# Altium PCB PiMX8MP_r0.3.PcbDoc (part 10 of 10)
Units mm, origin at the board's own origin, x right, y up, seen from the top; angles counter-clockwise.
Board outline 55 x 40 mm, 10 copper layers (Top Layer, Layer 1, Layer 2, Layer 3, Layer 4, Layer 5, Layer 6, Layer 7, Layer 8, Bottom Layer), stack 1.472 mm thick; 545 components, 477 nets, 2606 pads, 2278 vias.
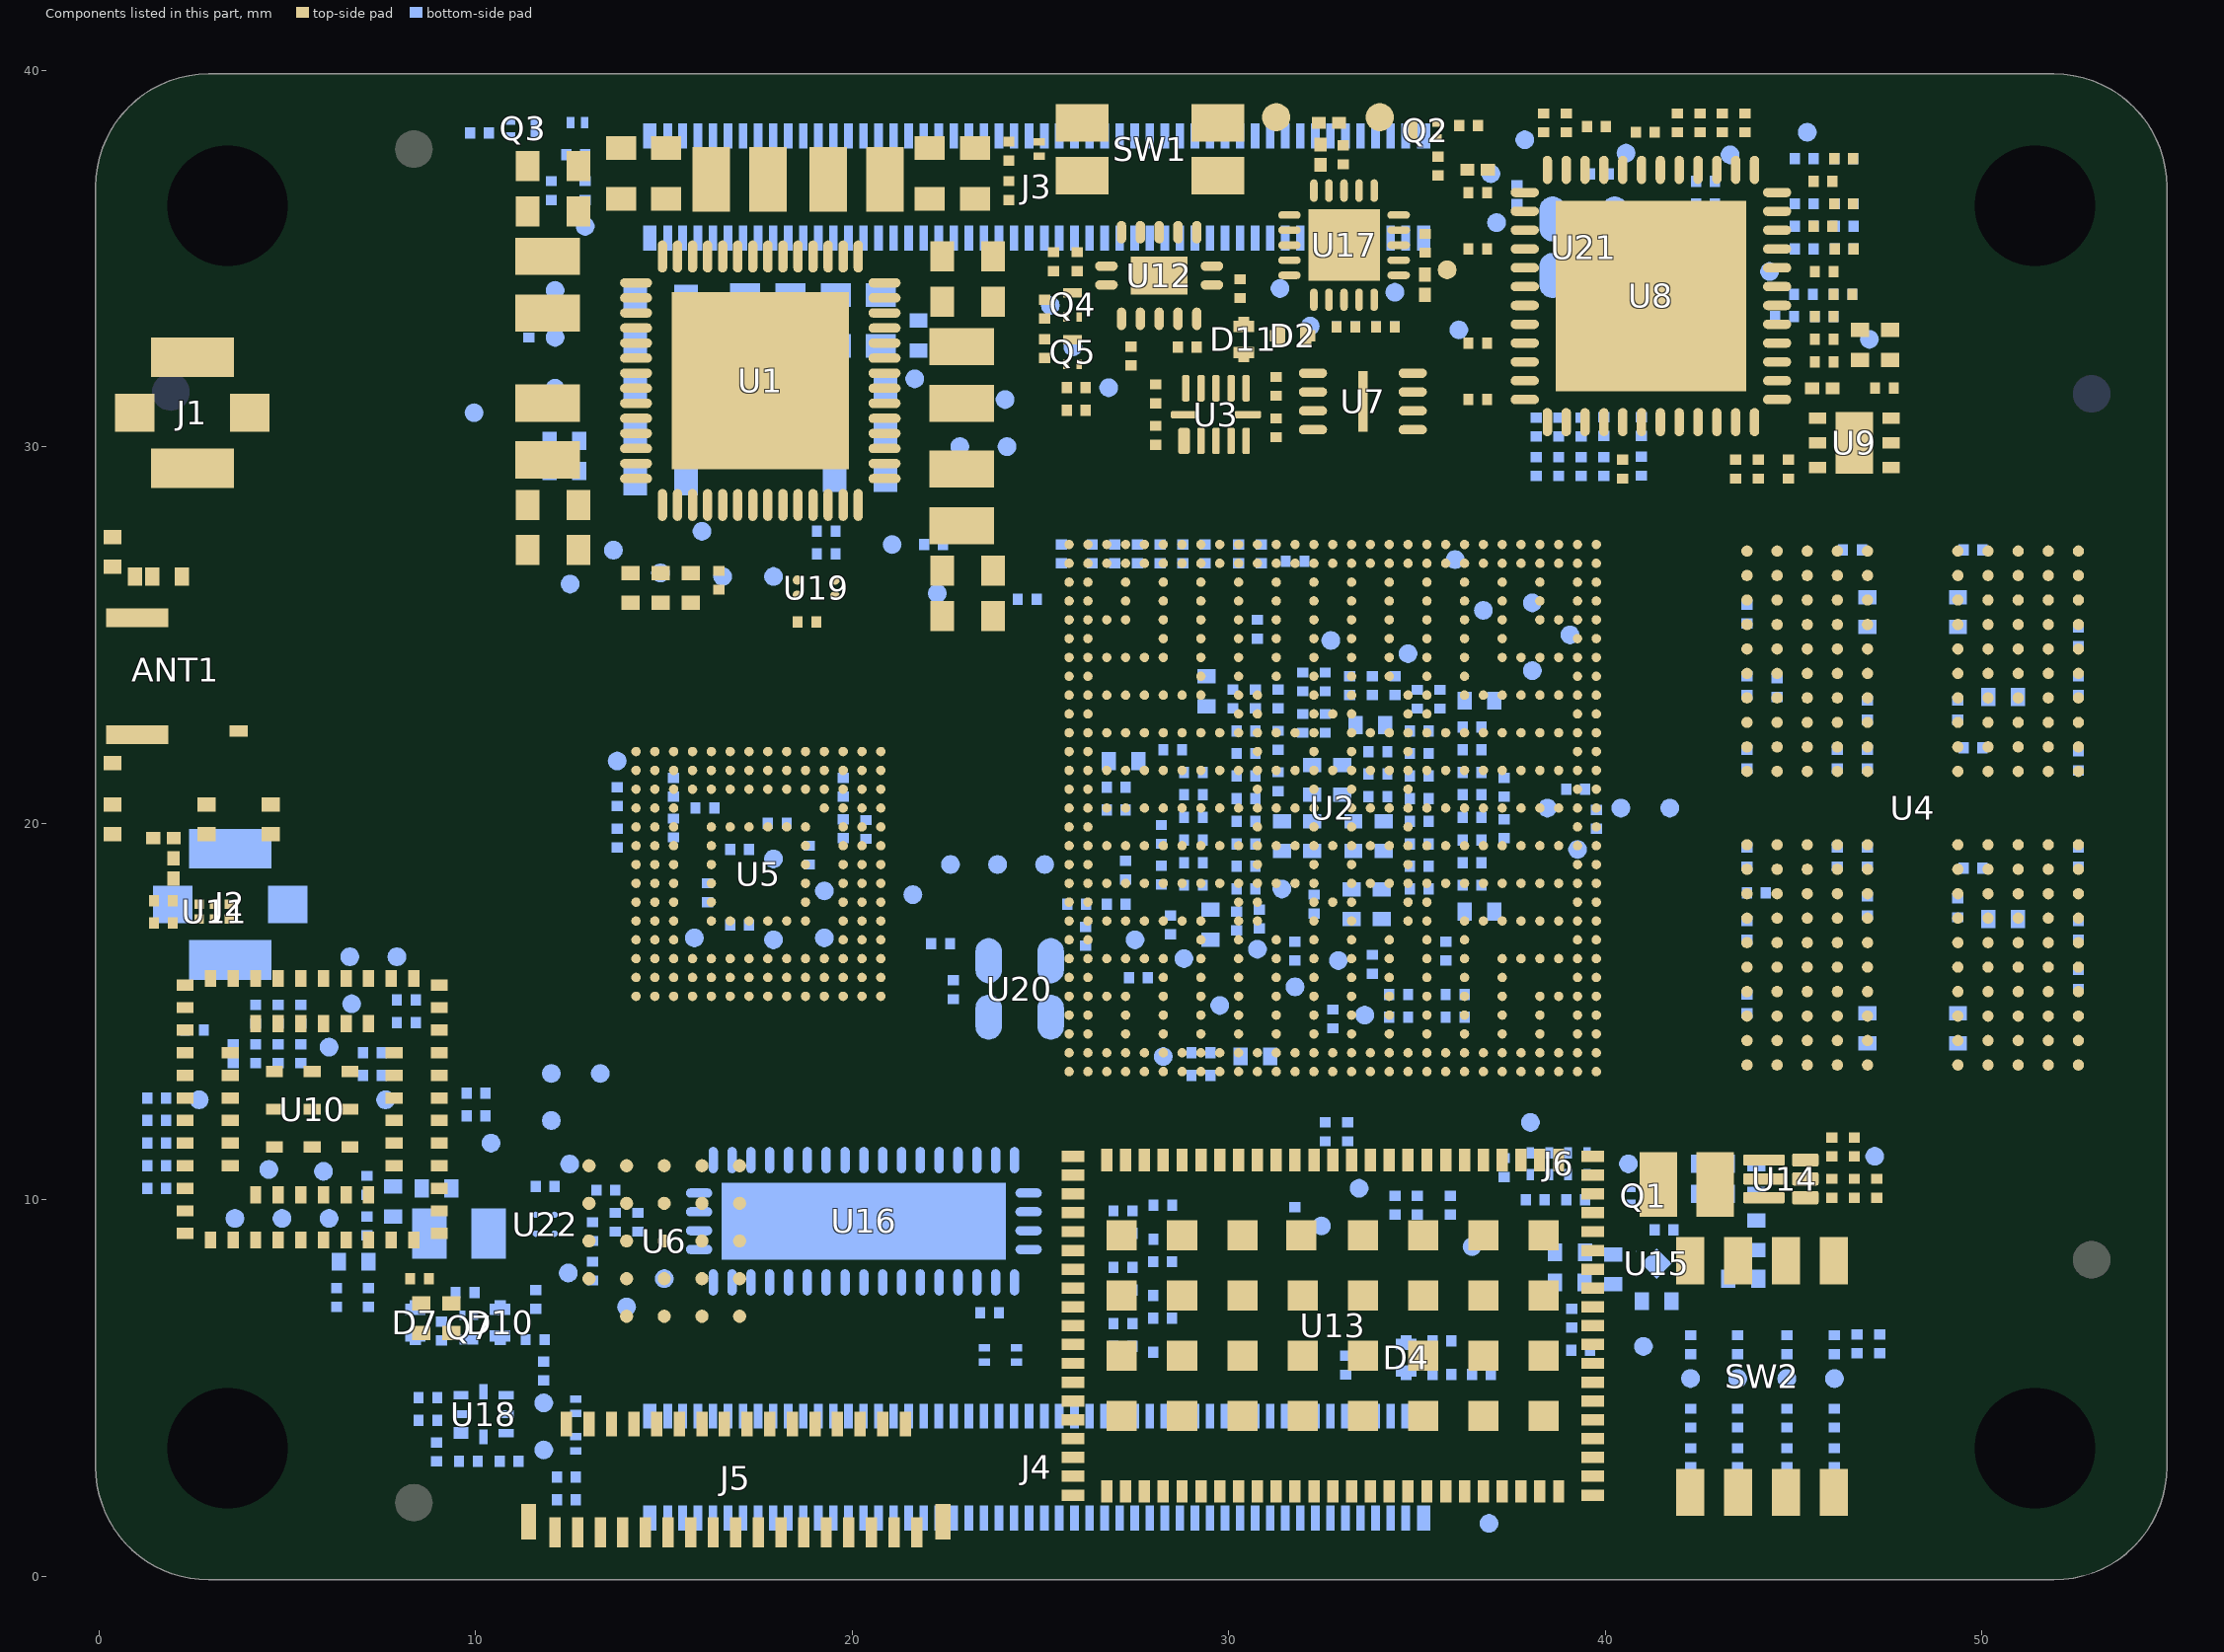
[diagram p18: the components of this part, seen from the top]

## Polygon pours and split planes (outlines as drawn) (continued)
GND on Layer 3 "GND_L04_P074" (solid, remove dead copper, pour order 74): 3.412,6.604 1.362,6.604 cw(c1.362,7.804) 0.162,7.804 0.162,19.704 cw(c0.362,19.704) 0.362,19.904 5.912,19.904 5.912,27.404 0.362,27.404 cw(c0.362,27.604) 0.162,27.604 0.162,32.004 cw(c1.362,32.004) 1.362,33.204 3.412,33.204 ccw(c3.412,36.404) 6.612,36.404 6.612,38.454 cw(c7.812,38.454) 7.812,39.654 47.012,39.654 cw(c47.012,38.454) 48.212,38.454 48.212,36.404 ccw(c51.412,36.404) 51.412,33.204 53.462,33.204 cw(c53.462,32.004) 54.662,32.004 54.662,7.804 cw(c53.462,7.804) 53.462,6.604 51.412,6.604 ccw(c51.412,3.404) 48.212,3.404 48.212,1.354 cw(c47.012,1.354) 47.012,0.154 7.812,0.154 cw(c7.812,1.354) 6.612,1.354 6.612,3.404 ccw(c3.412,3.404)
GND on Layer 6 "GND_L07_P076" (solid, remove dead copper, pour order 76): 3.412,6.604 1.362,6.604 cw(c1.362,7.804) 0.162,7.804 0.162,19.704 cw(c0.362,19.704) 0.362,19.904 5.912,19.904 5.912,27.404 0.362,27.404 cw(c0.362,27.604) 0.162,27.604 0.162,32.004 cw(c1.362,32.004) 1.362,33.204 3.412,33.204 ccw(c3.412,36.404) 6.612,36.404 6.612,38.454 cw(c7.812,38.454) 7.812,39.654 47.012,39.654 cw(c47.012,38.454) 48.212,38.454 48.212,36.404 ccw(c51.412,36.404) 51.412,33.204 53.462,33.204 cw(c53.462,32.004) 54.662,32.004 54.662,7.804 cw(c53.462,7.804) 53.462,6.604 51.412,6.604 ccw(c51.412,3.404) 48.212,3.404 48.212,1.354 cw(c47.012,1.354) 47.012,0.154 7.812,0.154 cw(c7.812,1.354) 6.612,1.354 6.612,3.404 ccw(c3.412,3.404)
GND on Layer 1 "GND_L02_P073" (solid, remove dead copper, pour order 73): 3.412,6.604 1.362,6.604 cw(c1.362,7.804) 0.162,7.804 0.162,19.704 cw(c0.362,19.704) 0.362,19.904 5.912,19.904 5.912,27.404 0.362,27.404 cw(c0.362,27.604) 0.162,27.604 0.162,32.004 cw(c1.362,32.004) 1.362,33.204 3.412,33.204 ccw(c3.412,36.404) 6.612,36.404 6.612,38.454 cw(c7.812,38.454) 7.812,39.654 47.012,39.654 cw(c47.012,38.454) 48.212,38.454 48.212,36.404 ccw(c51.412,36.404) 51.412,33.204 53.462,33.204 cw(c53.462,32.004) 54.662,32.004 54.662,7.804 cw(c53.462,7.804) 53.462,6.604 51.412,6.604 ccw(c51.412,3.404) 48.212,3.404 48.212,1.354 cw(c47.012,1.354) 47.012,0.154 7.812,0.154 cw(c7.812,1.354) 6.612,1.354 6.612,3.404 ccw(c3.412,3.404)

## Keep-outs
Top Layer:
  circle w0.2: c3.412,3.404 r2.9
  circle w0.2: c3.412,36.404 r2.9
  circle w0.2: c51.412,36.404 r2.9
  circle w0.2: c51.412,3.404 r2.9
Bottom Layer:
  circle w0.2: c51.412,3.404 r2.9
  circle w0.2: c51.412,36.404 r2.9
  circle w0.2: c3.412,3.404 r2.9
  circle w0.2: c3.412,36.404 r2.9

## Other copper
Top Layer:
  pour cut-out: 8.362,36.654 cw(c8.362,37.904) 7.112,37.904 cw(c8.362,37.904) 8.362,39.154 cw(c8.362,37.904) 9.612,37.904 cw(c8.362,37.904)
  pour cut-out: 9.612,1.954 cw(c8.362,1.954) 8.362,0.704 cw(c8.362,1.954) 7.112,1.954 cw(c8.362,1.954) 8.362,3.204 cw(c8.362,1.954)
  pour cut-out: 54.162,8.404 cw(c52.912,8.404) 52.912,7.154 cw(c52.912,8.404) 51.662,8.404 cw(c52.912,8.404) 52.912,9.654 cw(c52.912,8.404)
  region net CHIP_ANT: 1.712,20.154 1.712,19.904 cw(c1.487,19.58) 1.862,19.704 2.062,19.704 cw(c2.437,19.579) 2.212,19.904 2.212,20.154
  region net VCC3.3_SYS: 8.862,6.904 7.012,6.904 6.912,6.804 6.912,6.254 7.012,6.154 8.812,6.154 8.912,6.254 8.912,6.854
  region net VCC3.3_SYS: 21.562,31.404 21.962,31.804 24.062,31.804 24.162,31.904 24.162,33.154 24.062,33.254 23.212,33.254 23.012,33.454 23.012,35.404 22.912,35.504 22.062,35.504 21.962,35.404 21.962,32.354 21.712,32.104 20.462,32.104 20.412,32.054 20.412,31.454 20.462,31.404
  region net VCC3.3_SYS: 48.562,29.154 48.662,29.254 48.662,32.504 48.562,32.604 47.262,32.604 47.212,32.554 47.212,32.054 47.462,31.804 47.462,31.154 47.312,31.004 47.312,30.554 47.362,30.504 47.912,30.504 47.962,30.454 47.962,29.754 47.912,29.704 47.362,29.704 47.312,29.654 47.312,29.204 47.362,29.154
  region net GND: 45.712,28.954 45.912,29.154 47.162,29.154 47.212,29.204 47.212,31.054 47.362,31.204 47.362,31.704 47.312,31.754 47.012,31.754 46.962,31.704 46.962,31.554 46.412,31.004 46.112,31.004 46.062,30.954 46.062,29.804 45.962,29.704 45.362,29.704 45.312,29.654 45.312,29.404 45.262,29.354 44.612,29.354 44.562,29.304 44.562,29.004 44.612,28.954 44.662,28.954
  region net GND: 44.762,10.854 44.812,10.904 44.812,11.304 44.762,11.354 43.612,11.354 43.562,11.304 43.562,10.904 43.612,10.854
  region net GND: 23.612,37.304 23.762,37.454 23.762,38.405 23.612,38.554 21.712,38.554 21.612,38.454 21.612,37.404 21.712,37.304
  region net GND: 25.412,36.254 25.512,36.154 26.712,36.154 26.812,36.254 26.812,36.704 26.962,36.854 28.862,36.854 29.162,36.554 29.512,36.554 29.612,36.454 29.612,36.254 29.712,36.154 30.312,36.154 30.412,36.254 30.412,37.704 30.312,37.804 25.762,37.804 25.412,37.454 25.412,36.704
  region net GND: 23.112,35.404 23.212,35.504 24.062,35.504 24.162,35.404 24.162,33.454 24.062,33.354 23.262,33.354 23.112,33.504
  region net GND: 15.412,37.304 15.562,37.454 15.562,38.405 15.412,38.554 13.512,38.554 13.412,38.454 13.412,37.404 13.512,37.304
  region net GND: 11.862,35.754 12.012,35.904 12.012,37.804 11.912,37.904 11.062,37.904 10.962,37.804 10.962,35.804 11.012,35.754
  region net GND: 23.112,27.054 23.262,27.204 24.062,27.204 24.112,27.154 24.112,24.954 24.062,24.904 23.212,24.904 23.112,25.004
  region net GND: 13.85,24.9 13.75,25 13.75,26.05 13.85,26.15 16.15,26.15 16.262,26.354 16.712,26.354 16.762,26.404 16.762,27.004 16.412,27.354 16.412,28.854 16.462,28.904 16.662,28.904 16.712,28.854 16.712,27.904 16.662,27.854 16.662,27.554 16.812,27.404 17.862,27.404 18.25,27.017 18.25,24.9
  region net GND: 18.812,25.2 18.812,26.362 19.15,26.7 20.7,26.7 20.85,26.55 20.85,25.2 20.8,25.15 18.862,25.15
  region net GND: 10.962,28.904 11.012,28.954 11.862,28.954 12.012,28.804 12.012,26.854 12.162,26.704 13.562,26.704 13.662,26.604 13.662,25.004 13.562,24.904 11.362,24.904 10.962,25.304
  region net VCC1.8_SNVS: 15.862,28.904 15.912,28.854 15.912,27.204 16.062,27.054 16.062,26.454 16.012,26.404 15.412,26.404 15.362,26.454 15.362,27.004 15.612,27.254 15.612,28.854 15.662,28.904
  pour cut-out: 26.662,4.354 26.662,5.454 25.512,5.454 25.512,5.854 26.662,5.854 26.662,6.954 25.512,6.954 25.512,7.354 26.662,7.354 26.662,8.454 25.412,8.454 25.162,8.204 25.162,4.654 25.462,4.354
  region net ENET_VDDAL: 45.162,29.454 45.212,29.504 45.212,29.754 45.312,29.854 45.312,30.354 45.362,30.404 45.912,30.404 45.962,30.454 45.962,31.004 46.062,31.104 46.212,31.104 46.262,31.154 46.262,31.754 46.212,31.804 45.862,31.804 45.812,31.754 45.812,31.304 45.712,31.204 45.262,31.204 44.562,30.504 44.562,29.504 44.612,29.454
  region net PMIC_VINT: 16.262,28.904 16.312,28.854 16.312,27.304 16.662,26.954 16.662,26.504 16.612,26.454 16.212,26.454 16.162,26.504 16.162,27.104 16.012,27.254 16.012,28.854 16.062,28.904
  region net 8M_ONOFF: 25.812,37.954 30.312,37.954 30.412,38.054 30.412,39.104 25.412,39.104 25.412,38.354
  region net VCC1.8_SYS: 9.012,6.254 9.112,6.154 10.062,6.154 10.162,6.254 10.162,6.854 10.112,6.904 9.062,6.904 9.012,6.854
  region net WIFI_VCCIO: 8,7.717 8,8 7.896,8.104 7.512,8.104 7.412,8.204 7.412,9.154 7.362,9.204 6.962,9.204 6.912,9.154 6.912,8.104 6.912,7.104 7.012,7.004 10.112,7.004 10.162,7.054 10.162,7.454 10.062,7.554 8.162,7.554
  pour cut-out: 34.962,2.704 34.962,1.504 35.368,1.099 37.156,1.099 37.218,1.16 37.218,1.649 37.156,1.71 35.656,1.71 35.562,1.804 35.562,2.704
  region net TPU_VIN: 41.462,7.504 41.512,7.554 41.512,9.204 41.712,9.404 42.162,9.404 42.262,9.504 42.262,11.404 42.162,11.504 37.212,11.504 37.112,11.404 37.112,10.754 37.212,10.654 38.162,10.654 39.212,9.604 39.212,7.554 39.262,7.504
  region net TPU_3V3_BCK_IN: 44.762,10.254 43.612,10.254 43.562,10.204 43.562,9.554 43.612,9.504 44.762,9.504 44.812,9.554 44.812,10.204
  region net TPU_PSU_SW: 44.762,10.754 43.562,10.754 43.462,10.854 43.462,11.304 43.412,11.354 42.462,11.354 42.412,11.304 42.412,9.554 42.462,9.504 43.412,9.504 43.462,9.554 43.462,10.254 43.562,10.354 44.762,10.354 44.812,10.404 44.812,10.704
  region net DRAM_VCC1.1: 12.862,30.454 12.862,29.104 12.962,29.004 13.112,29.004 13.212,28.904 13.212,26.904 13.112,26.804 12.212,26.804 12.112,26.904 12.112,28.854 11.912,29.054 11.012,29.054 10.962,29.104 10.962,30.404 11.012,30.454
  region net PMIX_LX6: 11.012,31.704 14.662,31.704 14.712,31.654 14.712,31.054 14.662,31.004 13.262,31.004 12.862,30.604 11.012,30.604 10.962,30.654 10.962,31.654
  region net VCC5.0_SYS: 14.662,31.804 13.312,31.804 13.212,31.904 13.212,32.804 13.312,32.904 14.662,32.904 14.712,32.854 14.712,31.854
  region net VCC_SD2: 13.712,29.304 13.812,29.404 14.662,29.404 14.712,29.454 14.712,29.654 14.662,29.704 13.662,29.704 13.312,29.354 13.312,28.004 13.362,27.954 13.662,27.954 13.712,28.004
  region net VCC_ARM: 12.862,34.304 12.862,35.604 12.962,35.704 13.112,35.704 13.212,35.804 13.212,37.804 13.112,37.904 12.212,37.904 12.112,37.804 12.112,35.854 11.912,35.654 11.012,35.654 10.962,35.604 10.962,34.304 11.012,34.254 12.812,34.254
  region net PMIX_LX2: 11.012,33.004 14.662,33.004 14.712,33.054 14.712,33.654 14.662,33.704 13.262,33.704 12.862,34.104 11.012,34.104 10.962,34.054 10.962,33.054
  region net NetC31_1: 15.062,28.904 15.112,28.854 15.112,27.554 14.462,26.904 14.462,26.454 14.412,26.404 13.812,26.404 13.762,26.454 13.762,26.904 14.812,27.954 14.812,28.854 14.862,28.904
  region net NetC23_1: 15.462,28.904 15.512,28.854 15.512,27.304 15.262,27.054 15.262,26.454 15.212,26.404 14.612,26.404 14.562,26.454 14.562,26.854 15.212,27.504 15.212,28.854 15.262,28.904
  region net VCC5.0_SYS: 13.812,29.254 13.862,29.304 14.662,29.304 14.712,29.254 14.712,29.054 14.662,29.004 14.462,29.004 14.312,28.854 14.312,28.004 14.262,27.954 13.862,27.954 13.812,28.004
  region net VCC_SOC: 16.912,36.204 16.812,36.104 13.512,36.104 13.412,36.204 13.412,37.104 13.512,37.204 15.462,37.204 15.662,37.404 15.662,38.404 15.812,38.554 16.762,38.554 16.912,38.404
  region net VCC5.0_SYS: 17.612,34.654 17.612,35.754 17.962,36.104 18.612,36.104 18.712,36.004 18.712,34.654 18.662,34.604 17.662,34.604
  region net PMIX_LX1: 17.512,35.804 17.912,36.204 18.262,36.204 18.312,36.254 18.312,38.004 18.262,38.054 17.262,38.054 17.212,38.004 17.212,36.304 16.812,35.904 16.812,34.654 16.862,34.604 17.462,34.604 17.512,34.654
  region net VCC1.8_SYS: 22.012,28.554 21.912,28.454 21.912,25.004 22.012,24.904 22.912,24.904 23.012,25.004 23.012,27.104 23.212,27.304 24.062,27.304 24.162,27.404 24.162,28.454 24.062,28.554
  region net PMIX_LX5: 23.812,28.854 21.412,28.854 21.262,29.004 20.462,29.004 20.412,29.054 20.412,29.254 20.462,29.304 21.612,29.304 22.012,29.704 22.012,29.904 22.062,29.954 22.262,29.954 23.812,29.954 23.862,29.904 23.862,28.904
  region net VCC5.0_SYS: 20.462,30.504 21.812,30.504 21.912,30.404 21.912,29.754 21.562,29.404 20.462,29.404 20.412,29.454 20.412,30.454
  region net PMIX_LX3: 18.812,38.004 18.812,34.654 18.862,34.604 19.462,34.604 19.512,34.654 19.512,35.804 19.912,36.204 19.912,38.004 19.862,38.054 18.862,38.054
  region net PMIX_LX4: 23.712,30.604 20.462,30.604 20.412,30.654 20.412,31.254 20.462,31.304 21.612,31.304 22.012,31.704 23.762,31.704 23.762,30.654
  region net SD_PWR_ON: 21.662,32.204 21.862,32.404 21.862,32.754 21.812,32.804 21.512,32.804 21.462,32.754 21.462,32.654 21.312,32.504 20.462,32.504 20.412,32.454 20.412,32.254 20.462,32.204
  region net VCC_SOC: 20.217,36.204 20.317,36.104 23.617,36.104 23.717,36.204 23.717,37.104 23.617,37.204 21.667,37.204 21.462,37.409 21.462,38.459 21.367,38.554 20.312,38.554 20.217,38.459
  region net VCC5.0_SYS: 17.512,38.304 17.512,38.504 17.962,38.954 19.062,38.954 19.512,38.504 19.512,38.304 19.412,38.204 17.612,38.204
  region net VCC1.8_SYS: 46.412,32.604 47.012,32.604 47.062,32.554 47.062,32.054 46.862,31.854 46.862,31.654 46.762,31.554 46.462,31.554 46.362,31.654 46.362,32.554
  region net ETH_VDDIO: 46.362,32.854 46.362,33.554 46.462,33.654 47.062,33.654 47.162,33.754 47.162,34.254 47.212,34.304 47.662,34.304 47.862,34.104 47.862,32.854 47.812,32.804 46.412,32.804
  pour cut-out: 2.512,15.354 2.512,16.104 1.527,16.104 0.962,16.104 0.962,17.204 1.527,17.204 1.527,19.904 2.412,19.904 2.412,18.279 3.887,18.279 3.887,16.879 3.412,16.404 3.412,15.354
  text ".Layer_Name" at -4.872,-98.983 h2.5
Layer 1:
  region net VCC5.0_SYS: 17.912,35.004 18.412,35.004 cw(c18.412,34.804) 18.612,34.804 cw(c18.412,34.804) 18.412,34.604 17.912,34.604 cw(c17.912,34.804) 17.712,34.804 cw(c17.912,34.804)
  region net VCC1.8_SYS: 9.612,6.604 9.862,6.854 10.062,6.854 10.412,6.504 10.412,6.154 10.162,5.904 9.962,5.904 9.612,6.254
  region net VCC5.0_SYS: 13.312,32.404 13.712,32.804 14.462,32.804 14.562,32.704 14.562,32.304 14.162,31.904 13.412,31.904 13.312,32.004
  region net VCC5.0_SYS: 20.562,30.004 20.962,30.404 21.712,30.404 21.812,30.304 21.812,29.904 21.412,29.504 20.662,29.504 20.562,29.604
  text ".Layer_Name" at -2.806,-98.983 h2.5
Layer 2:
  pour cut-out: 7.317,19.364 5.967,18.014 2.867,18.014 2.467,18.414 1.667,18.414 1.317,18.064 1.317,16.664 3.317,14.664 3.867,14.664 4.267,15.064 6.567,15.064 6.967,14.664 6.967,11.064 6.717,10.814 4.617,10.814 2.417,13.014 1.367,13.014 0.917,12.564 0.917,8.864 2.917,6.864 4.517,6.864 4.817,6.564 8.267,6.564 8.717,6.114 8.717,4.964 8.267,4.514 8.267,3.514 8.667,3.114 9.217,3.114 9.967,3.864 9.967,4.864 10.217,5.114 11.567,5.114 11.917,4.764 11.917,2.564 13.567,0.914 31.867,0.914 33.317,2.364 34.067,2.364 34.967,3.264 37.617,3.264 40.317,0.564 47.367,0.564 47.867,1.064 47.867,2.864 47.117,3.614 47.117,5.664 46.667,6.114 44.967,6.114 44.517,6.564 42.867,6.564 42.667,6.764 42.667,7.014 41.667,8.014 41.667,8.564 41.967,8.864 42.617,8.864 43.667,9.914 45.867,9.914 46.417,10.464 46.417,10.964 46.717,11.264 48.367,11.264 49.117,12.014 52.017,12.014 53.367,13.364 53.367,20.064 38.27,20.064 35.758,17.552 32.33,17.552 31.849,17.071 29.779,17.071 29.417,17.433 29.417,19.461 29.091,19.788 29.091,22.212 28.976,22.327 28.251,22.327 28.067,22.511 28.067,23.414 7.317,23.414
  pour cut-out: 7.212,23.664 7.212,28.854 6.612,29.454 6.612,32.454 9.312,35.154 9.312,39.204 9.462,39.354 25.212,39.354 25.762,38.804 26.462,38.804 26.862,39.204 29.983,39.204 30.097,39.319 47.397,39.319 47.962,38.754 47.962,35.054 48.812,34.204 48.812,31.204 47.612,30.004 47.162,30.004 47.062,29.904 47.062,29.404 47.162,29.304 48.112,29.304 48.812,28.604 51.562,28.604 53.262,26.904 53.262,20.314 38.109,20.314 37.42,21.003 37.42,23.464 36.972,23.913 28.27,23.913 28.022,23.664
  region net VCC1.8_SYS: 9.912,6.304 10.162,6.554 11.262,6.554 11.362,6.454 11.362,6.254 10.862,5.754 10.112,5.754 9.912,5.954
  text ".Layer_Name" at -2.581,-98.983 h2.5
Layer 3:
  text ".Layer_Name" at -2.581,-98.983 h2.5
Layer 4:
  region net GND: 6.162,18.654 7.112,19.604 7.112,28.904 6.212,29.804 0.362,29.804 0.362,27.604 6.112,27.604 6.112,19.704 0.362,19.704 0.362,18.654
  text ".Layer_Name" at -2.581,-98.983 h2.5
Layer 5:
  region net GND: 0.362,18.504 6.312,18.504 7.212,19.404 7.212,28.604 7.012,28.804 7.012,29.104 7.012,36.654 6.812,36.654 6.812,36.454 cw(c3.359,36.454) 3.359,33.001 1.359,33.001 ccw(c1.359,32.004) 0.362,32.004 0.362,27.604 6.112,27.604 6.112,19.704 0.362,19.704
  text ".Layer_Name" at -2.581,-98.983 h2.5
Layer 6:
  text ".Layer_Name" at -2.581,-98.983 h2.5
Layer 7:
  region net VCC3.3_SYS: 20.862,36.304 21.012,36.454 21.762,36.454 21.812,36.404 21.812,35.804 21.362,35.354 20.962,35.354 20.862,35.454
  region net VCC1.8_SYS: 17.112,36.954 17.662,36.404 17.662,35.454 17.362,35.154 17.012,35.154 16.762,35.404 16.762,36.854 16.862,36.954
  region net GPIO_VREF: 19.712,35.754 19.262,36.204 19.262,36.404 19.362,36.504 19.612,36.504 20.112,36.004 20.112,35.454 20.012,35.354 19.812,35.354 19.712,35.454
  pour cut-out: 7.987,6.529 8.187,6.329 8.187,5.537 7.8,5.15 7.8,3.15 9.471,1.479 11.487,1.479 13.237,1.479 13.987,0.729 16.237,0.729 16.408,0.9 22.217,0.9 22.337,0.779 22.637,0.479 31.337,0.479 31.487,0.329 33.779,0.329 34.55,1.1 34.55,2.2 35.1,2.75 35.1,4 35.329,4.229 35.837,4.229 36.037,4.029 36.037,3.729 36.287,3.479 39.087,3.479 39.487,3.879 39.687,3.879 39.987,3.579 40.387,3.579 40.537,3.429 40.537,2.829 40.987,2.379 41.637,2.379 41.987,2.729 44.987,2.729 45.137,2.579 45.137,1.879 46.037,0.979 47.137,0.979 47.437,1.279 47.437,4.929 45.637,6.729 45.637,9.055 45.383,9.31 45.383,9.775 45.787,10.179 45.787,10.929 44.687,12.029 44.687,13.929 45.737,14.979 45.737,19.779 45.487,20.029 43.937,20.029 43.587,20.379 43.587,22.929 42.937,23.579 42.937,26.779 43.687,27.529 43.687,27.629 41.337,27.629 36.637,32.329 36.637,34.579 36.293,34.924 36.293,35.235 36.847,35.789 36.847,39.154 15.712,39.154 14.937,38.379 14.087,38.379 13.362,39.104 9.112,39.104 8.587,38.579 8.587,36.829 7.937,36.179 7.937,32.229 7.687,31.979 7.112,31.404 7.112,23.654 7.737,23.029 8.787,21.979 8.787,16.279 6.587,14.079 6.587,10.779 7.687,9.679 7.687,7.829 7.337,7.479 5.837,7.479 5.587,7.229 5.587,6.779 5.837,6.529
  region net VCC5.0_SYS: 44.762,8.254 45.162,8.654 45.462,8.654 45.612,8.504 45.612,7.104 45.462,6.954 44.962,6.954 44.762,7.154
  text ".Layer_Name" at -2.581,-98.983 h2.5
Layer 8:
  region net VCC3.3_SYS: 21.612,35.654 21.162,35.654 20.662,36.154 20.662,36.554 20.762,36.654 21.262,36.654 21.462,36.454 21.712,36.454 21.812,36.354 21.812,35.854
  region net GPIO_VREF: 20.062,35.654 20.012,35.704 20.012,35.854 20.062,35.904 20.062,36.104 20.012,36.154 19.412,36.154 19.362,36.104 19.362,35.454 19.412,35.404 20.012,35.404 20.062,35.454
  region net VCC1.8_SYS: 17.062,36.604 17.562,36.604 17.662,36.504 17.662,35.454 17.362,35.154 17.212,35.154 16.962,35.404 16.962,36.504
  region net VCC5.0_SYS: 44.312,8.204 44.412,8.304 44.962,8.304 45.062,8.204 45.062,7.204 44.962,7.104 44.412,7.104 44.312,7.204
  text ".Layer_Name" at -2.581,-98.983 h2.5
Bottom Layer:
  region net GND: 34.712,23.654 34.712,23.404 34.762,23.354 35.762,23.354 35.812,23.404 35.812,23.554 35.912,23.654 36.462,23.654 36.562,23.554 36.562,17.354 36.312,17.104 35.562,17.104 35.462,17.204 35.462,17.804 35.412,17.854 34.712,17.854 34.662,17.804 34.662,17.204 34.562,17.104 31.862,17.104 31.762,17.204 31.612,17.354 31.062,17.354 29.212,17.354 29.062,17.204 29.062,17.104 29.062,16.804 29.162,16.704 29.512,16.704 30.012,16.704 30.262,16.704 ccw(c30.262,16.904) 30.462,16.904 30.462,16.954 30.512,17.004 31.012,17.004 31.062,16.955 31.062,16.905 ccw(c31.262,16.905) 31.262,16.704 31.512,16.704 32.012,16.704 32.512,16.704 33.012,16.704 33.562,16.704 33.612,16.654 33.612,16.404 33.662,16.354 33.962,16.354 33.962,16.654 34.012,16.704 35.012,16.704 37.062,16.704 37.312,16.954 37.312,17.904 36.962,18.254 36.962,22.654 37.312,23.004 37.312,23.854 37.062,24.104 33.062,24.104 33.062,23.704 34.662,23.704
  pour cut-out: 54.162,8.404 ccw(c52.912,8.404) 52.912,9.654 ccw(c52.912,8.404) 51.662,8.404 ccw(c52.912,8.404) 52.912,7.154 ccw(c52.912,8.404)
  pour cut-out: 54.162,31.404 ccw(c52.912,31.404) 52.912,32.654 ccw(c52.912,31.404) 51.662,31.404 ccw(c52.912,31.404) 52.912,30.154 ccw(c52.912,31.404)
  pour cut-out: 1.912,30.204 ccw(c1.912,31.454) 3.162,31.454 ccw(c1.912,31.454) 1.912,32.704 ccw(c1.912,31.454) 0.662,31.454 ccw(c1.912,31.454)
  region net VCC_ARM: 11.362,35.504 11.862,35.504 cw(c11.862,35.304) 12.062,35.304 12.062,34.804 cw(c11.862,34.804) 11.862,34.604 11.362,34.604 cw(c11.362,34.804) 11.162,34.804 11.162,35.304 cw(c11.362,35.304)
  region net VCC3.3_SYS: 20.362,31.004 21.812,31.004 21.912,31.104 21.912,32.054 21.812,32.154 20.362,32.154 20.262,32.054 20.262,31.104
  region net VCC3.3_SYS: 18.412,36.104 18.362,36.154 18.362,36.454 18.512,36.604 19.212,36.604 19.362,36.754 19.662,36.754 20.112,36.304 21.312,36.304 21.412,36.404 21.412,37.104 21.162,37.354 19.712,37.354 19.162,37.354 18.862,37.054 17.862,37.054 17.762,36.954 17.762,35.204 17.812,35.154 18.362,35.154 18.412,35.204
  region net VCC3.3_SYS: 9.012,10.504 9.112,10.604 9.712,10.604 9.812,10.504 9.812,10.104 9.712,10.004 9.112,10.004 9.012,10.104
  region net VCC3.3_SYS: 16.012,18.104 16.762,18.104 16.962,17.904 16.962,17.154 16.912,17.104 16.612,17.104 16.562,17.154 16.562,17.604 16.462,17.704 16.012,17.704 15.962,17.754 15.962,18.054
  region net VCC3.3_SYS: 19.012,19.204 18.262,19.204 18.062,19.404 18.062,20.154 18.112,20.204 18.412,20.204 18.462,20.154 18.462,19.704 18.562,19.604 19.012,19.604 19.062,19.554 19.062,19.254
  region net VCC3.3_SYS: 32.862,17.204 33.562,17.204 33.612,17.254 33.612,17.804 33.562,17.854 32.862,17.854 32.812,17.804 32.812,17.254
  region net VCC3.3_SYS: 35.762,22.704 35.812,22.754 35.812,23.154 35.762,23.204 34.862,23.204 34.812,23.154 34.812,22.754 34.862,22.704
  region net VCCA1.8_SYS: 30.962,22.704 31.012,22.754 31.012,23.154 30.962,23.204 29.862,23.204 29.712,23.354 29.162,23.354 29.112,23.304 29.112,22.804 29.362,22.554 29.762,22.554 29.962,22.754 30.462,22.754 30.512,22.704
  region net VCCA1.8_SYS: 31.012,17.904 30.962,17.954 30.062,17.954 29.712,18.304 29.712,19.704 29.662,19.754 29.112,19.754 29.062,19.704 29.062,17.604 29.212,17.454 30.962,17.454 31.012,17.504
  region net VCCA1.8_SYS: 13.062,29.804 13.212,29.654 13.662,29.654 13.712,29.704 13.712,30.054 13.662,30.104 13.212,30.104 13.062,30.254 13.062,30.454 13.012,30.504 12.562,30.504 12.512,30.454 12.512,29.854 12.562,29.804
  region net GND: 32.762,24.104 32.762,24.154 32.462,24.154 32.412,24.104 32.262,24.104 32.112,24.104 32.062,24.154 31.812,24.154 31.762,24.104 29.912,24.104 28.662,24.104 28.562,24.004 28.562,23.454 28.562,23.254 28.612,23.204 28.962,23.204 29.012,23.254 29.012,23.354 29.112,23.454 29.762,23.454 29.912,23.304 31.412,23.304 31.462,23.354 31.462,23.654 31.562,23.754 32.162,23.754 32.212,23.704 32.312,23.704 32.362,23.754 32.712,23.754 32.762,23.804
  region net GND: 43.512,9.304 43.512,10.404 43.612,10.504 44.662,10.504 44.762,10.604 44.762,11.254 44.662,11.354 43.062,11.354 42.962,11.254 42.962,9.304 43.062,9.204 43.412,9.204
  region net GND: 41.412,7.004 41.462,7.054 41.462,7.994 41.762,8.294 41.762,8.315 41.487,8.59 41.487,9.429 41.462,9.454 38.212,9.454 38.162,9.404 38.162,6.504 38.212,6.454 38.712,6.454 38.762,6.504 38.762,6.804 38.862,6.904 39.412,6.904 39.462,6.954 39.812,6.954 39.862,7.004 39.862,7.254 39.762,7.354 39.612,7.354 39.562,7.304 39.262,7.304 39.162,7.404 39.162,8.904 39.212,8.954 39.862,8.954 39.912,8.904 39.912,8.354 40.012,8.254 41.012,8.254 41.262,8.004 41.262,7.754 41.112,7.604 40.762,7.604 40.612,7.454 40.612,7.054 40.662,7.004
  region net GND: 31.862,18.004 31.862,18.554 31.912,18.604 34.362,18.604 34.512,18.754 34.512,19.504 34.362,19.654 33.112,19.654 33.062,19.704 33.062,20.104 32.962,20.204 32.562,20.204 32.462,20.104 32.462,19.704 32.412,19.654 31.162,19.654 31.012,19.504 31.012,18.104 30.962,18.054 30.612,18.054 30.562,18.104 30.562,22.554 30.612,22.604 30.962,22.604 31.012,22.554 31.012,22.304 31.112,22.204 31.412,22.204 31.462,22.154 31.462,21.754 31.412,21.704 31.062,21.704 30.962,21.604 30.962,21.204 31.062,21.104 33.312,21.104 33.362,21.054 33.362,20.604 33.562,20.404 33.912,20.404 34.062,20.554 34.062,22.054 33.862,22.254 33.862,23.054 33.912,23.104 34.662,23.104 34.712,23.054 34.712,22.704 34.812,22.604 34.962,22.604 35.012,22.554 35.012,18.104 34.862,17.954 31.912,17.954
  region net GND: 28.812,22.604 28.662,22.604 28.562,22.504 28.562,18.254 28.662,18.154 28.912,18.154 28.962,18.204 28.962,22.454
  region net GND: 15.162,28.754 15.162,34.404 15.262,34.504 16.312,34.504 16.412,34.404 16.412,33.254 16.512,33.154 21.162,33.154 21.262,33.154 21.362,33.254 21.362,33.554 21.462,33.654 22.012,33.654 22.112,33.554 22.112,33.004 22.012,32.904 21.437,32.904 21.262,32.729 21.262,32.354 21.162,32.254 20.262,32.254 20.162,32.154 20.162,28.754 20.062,28.654 15.262,28.654
  region net GND: 26.962,21.254 27.062,21.354 27.062,21.854 27.012,21.904 26.612,21.904 26.512,21.804 26.512,20.254 26.612,20.154 26.862,20.154 26.962,20.254
  region net GND: 12.412,30.454 12.362,30.504 11.462,30.504 11.412,30.454 11.412,26.854 11.462,26.804 11.962,26.804 12.012,26.854 12.012,28.854 12.212,29.054 12.362,29.054 12.412,29.104 12.412,29.254
  region net GND: 8.812,10.004 7.662,10.004 7.512,10.154 7.512,10.304 7.362,10.454 6.862,10.454 6.762,10.554 6.762,10.704 6.762,10.854 6.462,11.154 4.012,11.154 3.912,11.054 3.912,10.804 3.812,10.704 3.362,10.704 3.262,10.804 3.262,13.254 3.362,13.354 6.212,13.354 6.662,13.804 6.662,14.054 6.762,14.154 7.112,14.154 7.212,14.054 7.212,11.504 8.012,10.704 8.112,10.604 8.812,10.604 8.912,10.504 8.912,10.104
  region net GND: 6.112,7.454 6.762,7.454 6.812,7.504 6.812,8.604 6.762,8.654 6.112,8.654 6.062,8.604 6.062,7.504
  region net VCC5.0_SYS: 20.262,28.754 20.262,30.804 20.362,30.904 21.812,30.904 21.912,30.804 21.912,28.754 21.812,28.654 20.362,28.654
  region net VCC5.0_SYS: 16.512,34.404 16.612,34.504 17.212,34.504 17.712,35.004 18.612,35.004 19.112,34.504 21.162,34.504 21.262,34.404 21.262,33.354 21.162,33.254 16.612,33.254 16.512,33.354
  region net SD_PWR_ON: 21.362,32.354 21.362,32.654 21.512,32.804 22.012,32.804 22.112,32.704 22.112,32.354 22.012,32.254 21.462,32.254
  region net VCC1.8_SYS: 16.962,35.204 16.962,36.504 17.062,36.604 17.562,36.604 17.662,36.504 17.662,35.204 17.612,35.154 17.012,35.154
  region net GPIO_VREF: 19.362,35.204 19.362,36.104 19.412,36.154 19.612,36.154 19.662,36.104 19.662,35.904 19.662,35.204
  region net VCC5.0_SYS: 17.462,38.954 19.562,38.954 19.662,38.854 19.662,37.904 17.362,37.904 17.362,38.854
  region net VCC1.8_SYS: 15.062,20.104 14.962,20.204 14.662,20.204 14.562,20.304 14.562,20.604 14.462,20.704 14.112,20.704 14.012,20.804 13.612,20.804 13.562,20.854 13.562,21.104 13.612,21.154 14.512,21.154 14.762,20.904 15.912,20.904 16.012,20.804 16.012,20.204 15.912,20.104 15.912,19.954 15.862,19.904 15.112,19.904 15.062,19.954
  region net DRAM_VCC1.1: 12.912,27.704 13.012,27.604 13.012,26.454 12.662,26.104 12.362,26.104 12.112,26.354 12.112,27.604 12.212,27.704
  region net VCC_SD2: 12.762,27.904 12.662,28.004 12.662,28.904 12.512,29.054 12.512,29.654 12.562,29.704 13.012,29.704 13.162,29.554 13.662,29.554 13.712,29.504 13.712,28.004 13.612,27.904
  region net TPU_VIN: 39.267,8.854 39.267,7.499 39.312,7.454 39.562,7.454 39.612,7.504 39.762,7.504 39.812,7.554 39.812,8.804 39.762,8.854
  region net TPU_AON: 40.462,6.454 40.512,6.504 40.512,7.504 40.712,7.704 41.013,7.704 41.133,7.824 41.133,7.949 40.948,8.134 39.992,8.134 39.912,8.054 39.912,7.404 39.962,7.354 39.962,6.954 39.862,6.854 39.512,6.854 39.462,6.804 38.912,6.804 38.862,6.754 38.862,6.504 38.912,6.454
  region net TPU_1V8_LDO_IN: 43.512,7.104 43.512,8.154 43.462,8.204 41.847,8.204 41.562,7.92 41.562,7.069 41.627,7.004 43.412,7.004
  region net TPU_VIN: 42.862,11.254 42.862,9.304 42.762,9.204 42.362,9.204 41.762,9.804 41.762,11.254 41.862,11.354 42.762,11.354
  region net VCC5.0_SYS: 43.612,7.104 43.712,7.004 44.662,7.004 44.762,7.104 44.762,9.004 44.662,9.104 42.412,9.104 42.362,9.054 42.362,8.354 42.412,8.304 43.512,8.304 43.612,8.204
  region net TPU_3V3_BCK_IN: 44.762,9.304 44.762,10.304 44.662,10.404 43.712,10.404 43.612,10.304 43.612,9.304 43.712,9.204 44.662,9.204
  region net DRAM_VCC1.1: 36.262,17.204 36.462,17.404 36.462,23.504 36.412,23.554 35.962,23.554 35.912,23.504 35.912,22.704 35.812,22.604 35.812,18.054 35.562,17.804 35.562,17.304 35.662,17.204
  region net WL_REG_EN: 6.112,7.354 7.362,7.354 7.412,7.304 7.412,6.954 7.362,6.904 6.112,6.904 6.062,6.954 6.062,7.304
  region net WIFI_VCCIO: 6.962,9.254 6.812,9.104 2.612,9.104 2.512,9.204 2.512,10.354 2.612,10.454 3.062,10.454 3.162,10.554 3.162,12.104 3.062,12.204 2.312,12.204 2.212,12.304 2.212,13.504 1.912,13.804 1.912,14.904 2.012,15.004 5.512,15.004 5.612,15.104 5.612,15.354 5.512,15.454 1.712,15.454 1.412,15.154 1.412,13.204 1.612,13.004 1.612,8.754 1.612,7.504 1.662,7.454 5.912,7.454 5.962,7.504 5.962,8.654 6.062,8.754 6.812,8.754 6.912,8.654 6.912,7.504 6.962,7.454 7.362,7.454 7.412,7.504 7.412,9.204 7.362,9.254
  region net WIFI_VCC1.35: 7.512,9.754 7.512,8.054 7.562,8.004 9.212,8.004 9.262,8.054 9.262,9.804 9.162,9.904 7.662,9.904
  region net WIFI_VLX: 9.362,9.804 9.462,9.904 10.762,9.904 10.862,9.804 10.862,8.254 10.762,8.154 9.962,8.154 9.862,8.254 9.862,9.354 9.762,9.454 9.462,9.454 9.362,9.554
  region net VCC1.8_SYS: 22.162,25.054 21.962,25.254 21.962,26.504 22.612,27.154 22.912,27.154 23.012,27.054 23.012,25.154 22.912,25.054
  region net VCC5.0_SYS: 14.962,27.904 15.062,28.004 15.062,34.404 14.962,34.504 13.762,34.504 13.662,34.404 13.662,32.904 13.162,32.404 13.162,30.304 13.262,30.204 13.712,30.204 13.812,30.104 13.812,28.004 13.912,27.904
  region net VCC_SD2: 27.412,21.454 27.812,21.454 28.112,21.754 28.412,21.754 28.462,21.804 28.462,22.504 28.362,22.604 27.712,22.604 27.512,22.404 27.512,22.054 27.412,21.954
  region net VCC1.8_SYS: 29.712,19.954 29.712,22.204 29.662,22.254 29.112,22.254 29.062,22.204 29.062,19.954 29.112,19.904 29.662,19.904
  region net VCC_SOC: 30.412,22.654 30.462,22.604 30.462,18.104 30.412,18.054 30.112,18.054 29.812,18.354 29.812,22.454 30.012,22.654
  region net VCC1.8_SYS: 31.862,17.804 31.862,17.304 31.962,17.204 32.662,17.204 32.712,17.254 32.712,17.804 32.662,17.854 31.912,17.854
  region net VCC_SOC: 31.762,17.504 31.762,18.604 31.862,18.704 34.312,18.704 34.412,18.804 34.412,19.454 34.312,19.554 33.062,19.554 32.962,19.654 32.962,20.054 32.912,20.104 32.612,20.104 32.562,20.054 32.562,19.654 32.462,19.554 31.212,19.554 31.112,19.454 31.112,17.504 31.162,17.454 31.712,17.454
  region net VCC1.8_SYS: 33.762,17.204 34.512,17.204 34.562,17.254 34.562,17.804 34.512,17.854 33.762,17.854 33.712,17.804 33.712,17.254
  region net VCC_SOC: 35.662,22.604 35.712,22.554 35.712,18.154 35.612,18.054 35.162,18.054 35.112,18.104 35.112,22.554 35.162,22.604
  region net VCC_ARM: 31.162,22.304 31.562,22.304 31.662,22.404 31.662,22.604 31.762,22.704 32.712,22.704 32.762,22.754 32.762,23.054 32.712,23.104 31.562,23.104 31.462,23.204 31.162,23.204 31.112,23.154 31.112,22.354
  region net VCC_ARM: 32.262,21.204 33.362,21.204 33.462,21.104 33.462,20.654 33.612,20.504 33.862,20.504 33.962,20.604 33.962,22.004 33.862,22.104 31.662,22.104 31.562,22.004 31.562,21.704 31.462,21.604 31.112,21.604 31.062,21.554 31.062,21.254 31.112,21.204
  region net VCC1.8_SYS: 32.712,23.204 32.762,23.254 32.762,23.604 32.712,23.654 32.462,23.654 32.412,23.604 32.112,23.604 32.062,23.654 31.612,23.654 31.562,23.604 31.562,23.254 31.612,23.204
  region net GPIO_VREF: 33.112,22.354 33.112,23.154 33.062,23.204 33.062,23.554 33.112,23.604 34.562,23.604 34.612,23.554 34.612,23.254 34.562,23.204 33.862,23.204 33.762,23.104 33.762,22.354 33.712,22.304 33.162,22.304
  text ".Layer_Name" at -8.204,-98.983 h2.5

## Silkscreen, mask and mechanical layers (free items; w line width, h text height)
Top Paste:
  text ".Layer_Name" at -4.872,-98.983 h2.5
Bottom Paste:
  text ".Layer_Name" at -8.204,-99.4 h2.5
Top Solder:
  drawing of 9 lines, arcs and shapes, not listed
  text "Pi.MX8" at 49.162,31.125 h1.8
  text "VIP r0.3" at 49.162,30.266 h1
  text "15.09.2025" at 49.162,29.416 h1
  text ".Layer_Name" at -5.913,-98.983 h2.5
Bottom Solder:
  drawing of 9 lines, arcs and shapes, not listed
  text ".Layer_Name" at -9.245,-99.4 h2.5
Outline:
  the board outline again, w0.05
  text ".Layer_Name" at -1.956,-104.45 h2.5
Reference:
  circle w0.05: c-4.809,-72.574 r1.6
  circle w0.05: c-4.809,-105.574 r1.6
  circle w0.05: c-52.809,-105.578 r1.6
  circle w0.05: c-53.742,-78.074 r1
  circle w0.05: c-52.809,-72.574 r1.6
  circle w0.05: c-4.809,-72.574 r2.9
  circle w0.05: c-52.809,-72.574 r2.9
  circle w0.05: c-52.809,-105.578 r2.9
  circle w0.05: c-4.809,-105.574 r2.9
  circle w0.05: c-53.742,-78.074 r0.25
  lines w0.05: -53.059,-105.578 -52.559,-105.578 ; -53.059,-72.574 -52.559,-72.574 ; -52.809,-105.828 -52.809,-105.328 ; -52.809,-72.824 -52.809,-72.324 ; -5.059,-105.574 -4.559,-105.574 ; -5.059,-72.574 -4.559,-72.574 ; -4.809,-105.824 -4.809,-105.324 ; -4.809,-72.824 -4.809,-72.324 ; -54.642,-79.374 -52.842,-79.374 ; -54.642,-79.374 -54.742,-79.374 cw(c-54.742,-79.074) -55.042,-79.074 -55.042,-77.074 cw(c-54.742,-77.074) -54.742,-76.774 -54.642,-76.774 ; -54.642,-79.374 -54.642,-79.574 -52.842,-79.574 -52.842,-79.374 ; -54.642,-76.774 -52.842,-76.774 ; -54.642,-76.774 -54.642,-76.574 -52.842,-76.574 -52.842,-76.774 ; -52.842,-79.374 -52.742,-79.374 ccw(c-52.742,-79.074) -52.442,-79.074 -52.442,-77.074 ccw(c-52.742,-77.074) -52.742,-76.774 -52.842,-76.774 ; -56.309,-106.074 ccw(c-53.309,-106.074) -53.309,-109.074 -4.309,-109.074 ccw(c-4.309,-106.074) -1.309,-106.074 -1.309,-72.074 ccw(c-4.309,-72.074) -4.309,-69.074 -53.309,-69.074 ccw(c-53.309,-72.074) -56.309,-72.074 -56.309,-106.074
  text "4x" at -65.059,-74.624 h2
Drill Drawing:
  circle w0.15: c-58.102,-6.144 r0.428
  lines w0.15: -58.529,-8.497 -57.674,-8.497 -57.674,-7.641 -58.529,-7.641 -58.529,-8.497
  lines w0.381: -59.304,-9.075 117.072,-9.075 ; -59.304,-5.224 117.072,-5.224 ; -52.164,-11 -52.164,-3.299 ; -44.421,-11 -44.421,-3.299 ; -29.622,-11 -29.622,-3.299 ; -23.06,-11 -23.06,-3.299 ; -13.572,-11 -13.572,-3.299 ; 5.718,-11 5.718,-3.299 ; 13.358,-11 13.358,-3.299 ; 23,-11 23,-3.299 ; 42.419,-11 42.419,-3.299 ; 53.446,-11 53.446,-3.299 ; 70.632,-11 70.632,-3.299 ; 87.819,-11 87.819,-3.299 ; 99,-11 99,-3.299 ; -59.304,-11 117.072,-11 117.072,-3.299 -59.304,-3.299 -59.304,-11
  text "Symbol" at -58.148,-4.647 h0.92
  text "Count" at -51.586,-4.647 h0.92
  text "Hole Size" at -43.844,-4.647 h0.92
  text "Plated" at -29.044,-4.647 h0.92
  text "Hole Type" at -22.482,-4.647 h0.92
  text "Drill Layer Pair" at -12.994,-4.647 h0.92
  text "Via/Pad" at 6.296,-4.647 h0.92
  text "Pad Shape" at 13.936,-4.647 h0.92
  text "Template" at 23.578,-4.647 h0.92
  text "Description" at 42.996,-4.647 h0.92
  text "Hole Tolerance (+)" at 54.024,-4.647 h0.92
  text "Hole Tolerance (-)" at 71.21,-4.647 h0.92
  text "Hole Length" at 88.396,-4.647 h0.92
  text "Routed Path Length" at 99.578,-4.647 h0.92
  text "4" at -51.586,-6.572 h0.77
  text "125.98mil (3.200mm)" at -43.844,-6.572 h0.77
  text "NPTH" at -29.044,-6.572 h0.77
  text "Round" at -22.482,-6.572 h0.77
  text "Top Layer - Bottom Layer" at -12.994,-6.572 h0.77
  text "Pad" at 6.296,-6.572 h0.77
  text "Rounded" at 13.936,-6.572 h0.77
  text "r100_105hn320r50m580_585" at 23.578,-6.572 h0.77
  text "-" at 88.396,-6.572 h0.77
  text "-" at 99.578,-6.572 h0.77
  text "946" at -51.586,-8.497 h0.77
  text "7.87mil (0.200mm)" at -43.844,-8.497 h0.77
  text "PTH" at -29.044,-8.497 h0.77
  text "Round" at -22.482,-8.497 h0.77
  text "Top Layer - Bottom Layer" at -12.994,-8.497 h0.77
  text "Via" at 6.296,-8.497 h0.77
  text "Rounded" at 13.936,-8.497 h0.77
  text "(Mixed)" at 23.578,-8.497 h0.77
  text "-" at 88.396,-8.497 h0.77
  text "-" at 99.578,-8.497 h0.77
  text "950 Total" at -51.586,-10.422 h0.77
Fab Notes:
  drawing of 707 lines, arcs and shapes, not listed
  text "1" at -43.262,158.895 h2.5
  text "2" at 3.822,158.895 h2.5
  text "3" at 51.322,158.895 h2.5
  text "4" at 98.822,158.895 h2.5
  text "A" at -64.928,137.48 h2.5
  text "A" at 120.072,137.48 h2.5
  text "Layer stack table" at -28.629,133.516 h2.54
  text "Layer" at -27.082,130.003 h1.52
  text "Name" at -16.67,130.003 h1.52
  text "Material" at 6.946,130.003 h1.52
  text "Thickness" at 28.784,130.003 h1.52
  text "Constant" at 45.29,130.003 h1.52
  text "Board Layer Stack" at 59.764,130.003 h1.52
  text "Top Overlay" at -16.67,126.955 h1.52
  text "Top Solder" at -16.67,123.907 h1.52
  text "Solder Resist" at 6.946,123.907 h1.52
  text "0,010mm" at 28.784,123.907 h1.52
  text "3.5" at 45.29,123.907 h1.52
  text "1" at -27.082,120.859 h1.52
  text "Top Layer" at -16.67,120.859 h1.52
  text "0,036mm" at 28.784,120.859 h1.52
  text "Dielectric 1" at -16.67,117.811 h1.52
  text "PP-1080" at 6.946,117.811 h1.52
  text "0,075mm" at 28.784,117.811 h1.52
  text "4" at 45.29,117.811 h1.52
  text "2" at -27.082,114.763 h1.52
  text "Layer 1" at -16.67,114.763 h1.52
  text "CF-004" at 6.946,114.763 h1.52
  text "0,035mm" at 28.784,114.763 h1.52
  text "Dielectric 2" at -16.67,111.715 h1.52
  text "PP-106" at 6.946,111.715 h1.52
  text "0,055mm" at 28.784,111.715 h1.52
  text "4" at 45.29,111.715 h1.52
  text "Dielectric 3" at -16.67,108.667 h1.52
  text "PP-106" at 6.946,108.667 h1.52
  text "0,055mm" at 28.784,108.667 h1.52
  text "4" at 45.29,108.667 h1.52
  text "3" at -27.082,105.619 h1.52
  text "Layer 2" at -16.67,105.619 h1.52
  text "CF-004" at 6.946,105.619 h1.52
  text "0,035mm" at 28.784,105.619 h1.52
  text "Core 1" at -16.67,102.571 h1.52
  text "S1000H" at 6.946,102.571 h1.52
  text "0,200mm" at 28.784,102.571 h1.52
  text "4.6" at 45.29,102.571 h1.52
  text "4" at -27.082,99.523 h1.52
  text "Layer 3" at -16.67,99.523 h1.52
  text "CF-004" at 6.946,99.523 h1.52
  text "0,035mm" at 28.784,99.523 h1.52
  text "Dielectric 4" at -16.67,96.475 h1.52
  text "PP-1080" at 6.946,96.475 h1.52
  text "0,075mm" at 28.784,96.475 h1.52
  text "4" at 45.29,96.475 h1.52
  text "5" at -27.082,93.427 h1.52
  text "Layer 4" at -16.67,93.427 h1.52
  text "CF-004" at 6.946,93.427 h1.52
  text "0,035mm" at 28.784,93.427 h1.52
  text "Core 2" at -16.67,90.379 h1.52
  text "Core-043" at 6.946,90.379 h1.52
  text "0,200mm" at 28.784,90.379 h1.52
  text "4.6" at 45.29,90.379 h1.52
  text "B" at -64.928,89.65 h2.5
  text "B" at 120.072,89.65 h2.5
  text "6" at -27.082,87.331 h1.52
  text "Layer 5" at -16.67,87.331 h1.52
  text "CF-004" at 6.946,87.331 h1.52
  text "0,035mm" at 28.784,87.331 h1.52
  text "Dielectric 5" at -16.67,84.283 h1.52
  text "PP-1080" at 6.946,84.283 h1.52
  text "0,075mm" at 28.784,84.283 h1.52
  text "4" at 45.29,84.283 h1.52
  text "7" at -27.082,81.235 h1.52
  text "Layer 6" at -16.67,81.235 h1.52
  text "CF-004" at 6.946,81.235 h1.52
  text "0,035mm" at 28.784,81.235 h1.52
  text "Core 3" at -16.67,78.187 h1.52
  text "S1000H" at 6.946,78.187 h1.52
  text "0,200mm" at 28.784,78.187 h1.52
  text "4.6" at 45.29,78.187 h1.52
  text "8" at -27.082,75.139 h1.52
  text "Layer 7" at -16.67,75.139 h1.52
  text "CF-004" at 6.946,75.139 h1.52
  text "0,035mm" at 28.784,75.139 h1.52
  text "Dielectric 6" at -16.67,72.091 h1.52
  text "PP-106" at 6.946,72.091 h1.52
  text "0,055mm" at 28.784,72.091 h1.52
  text "4" at 45.29,72.091 h1.52
  text "Dielectric 7" at -16.67,69.043 h1.52
  text "PP-106" at 6.946,69.043 h1.52
  text "0,055mm" at 28.784,69.043 h1.52
  text "4" at 45.29,69.043 h1.52
  text "9" at -27.082,65.995 h1.52
  text "Layer 8" at -16.67,65.995 h1.52
  text "CF-004" at 6.946,65.995 h1.52
  text "0,035mm" at 28.784,65.995 h1.52
  text "Dielectric 8" at -16.67,62.947 h1.52
  text "PP-1080" at 6.946,62.947 h1.52
  text "0,075mm" at 28.784,62.947 h1.52
  text "4" at 45.29,62.947 h1.52
  text "10" at -27.082,59.899 h1.52
  text "Bottom Layer" at -16.67,59.899 h1.52
  text "0,036mm" at 28.784,59.899 h1.52
  text "Bottom Solder" at -16.67,56.851 h1.52
  text "Solder Resist" at 6.946,56.851 h1.52
  text "0,010mm" at 28.784,56.851 h1.52
  text "3.5" at 45.29,56.851 h1.52
  text "Bottom Overlay" at -16.67,53.803 h1.52
  text "C" at -64.928,41.8 h2.5
  text "C" at 120.072,41.8 h2.5
  text "D" at -64.928,-6.03 h2.5
  text "D" at 120.072,-6.03 h2.5
  text "E" at -64.928,-53.86 h2.5
  text "E" at 120.072,-53.86 h2.5
  text "TITLE" at -18.095,-78.526 h1
  text ".Pcb_File_Name_No_Path" at 5.704,-80.817 h2.5
  text "VARIANT" at -18.095,-85.026 h1
  text "APPROVALS" at 34.99,-86.98 h1.25
  text "DATE" at 61.864,-86.98 h1.25
  text ".VariantName" at 0.573,-88.022 h2
  text "LAYER NAME" at -18.095,-91.526 h1
  text "DRAWN" at 29.405,-91.526 h1
  text "2025-10-06" at 54.405,-93.356 h2
  text "Lukas Henkel" at 31.408,-94.105 h1.5
  text "OV Tech GmbH" at 82.826,-95.605 h2.5
  text "CHECKED" at 29.405,-97.136 h1
  text "Am Weichselgarten 9" at 86.054,-98.272 h1.25
  text "2025-10-06" at 54.405,-98.966 h2
  text "Thomas Ludemann" at 29.408,-99.605 h1.5
  text "91058 Erlangen" at 89.074,-100.772 h1.25
  text "F" at -64.928,-101.69 h2.5
  text "F" at 120.072,-101.69 h2.5
  text "ENGINEER" at 29.405,-102.746 h1
  text "Germany" at 93.24,-102.772 h1.25
  text "2025-10-06" at 54.405,-104.576 h2
  text "https://www.open-visions.com/" at 80.223,-104.772 h1.25
  text "Lukas Henkel" at 31.908,-105.105 h1.5
  text "REV." at 76.905,-108.356 h1
  text "SIZE" at 85.405,-108.356 h1
  text "DATE" at 93.905,-108.356 h1
  text "0.3" at 77.905,-111.856 h2
  text "A4" at 86.405,-111.856 h2
  text ".Print_Date" at 94.905,-111.856 h2
  text "SCALE" at 76.905,-114.856 h1
  text "PAGE" at 101.905,-114.856 h1
  text ".Customer" at 16.742,-117.855 h2
  text ".Print_Scale" at 77.741,-118.355 h2
  text "1 OF 1" at 104.74,-118.355 h2
  text "Copy right 2026 OV Tech GmbH / This hardware design is licensed under the CERN Open Hardware Licence Version 2 - Strongly Reciprocal (CERN-OHL-S-2.0). You may redistribute and modify this design under the terms of the license. This design is provided \"as is\", without any warranties. See LICENSE file in the repository for full license details." at -18.25,-118.711 h1
  text "1" at -43.262,-123.105 h2.5
  text "2" at 3.822,-123.105 h2.5
  text "3" at 51.322,-123.105 h2.5
  text "4" at 98.822,-123.105 h2.5

## Dimensions
2.919,39.904 to 2.919,-0.096 on Outline
-0.081,36.904 to 54.919,36.904 on Outline
-52.809,-72.574 to -55.735,-75.5 on Reference
-52.809,-72.324 to -4.809,-72.324 on Reference
-4.559,-105.574 to -4.559,-72.574 on Reference
-4.309,-109.074 to -4.309,-69.074 on Reference
-56.309,-72.074 to -1.309,-72.074 on Reference

## Text inside footprints (layer, text, board x,y; h text height)
U18: Bottom 3D Body "Keepout" at 10.342,4.088 h0.15 r315